# Altium PCB PCB_Smart_Door.PcbDoc
Units mil, origin at the board's own origin, x right, y up, seen from the top; angles counter-clockwise.
Board outline 4650 x 3255 mil, 2 copper layers (Top Layer, Bottom Layer); 55 components, 54 nets, 225 pads, 23 vias.
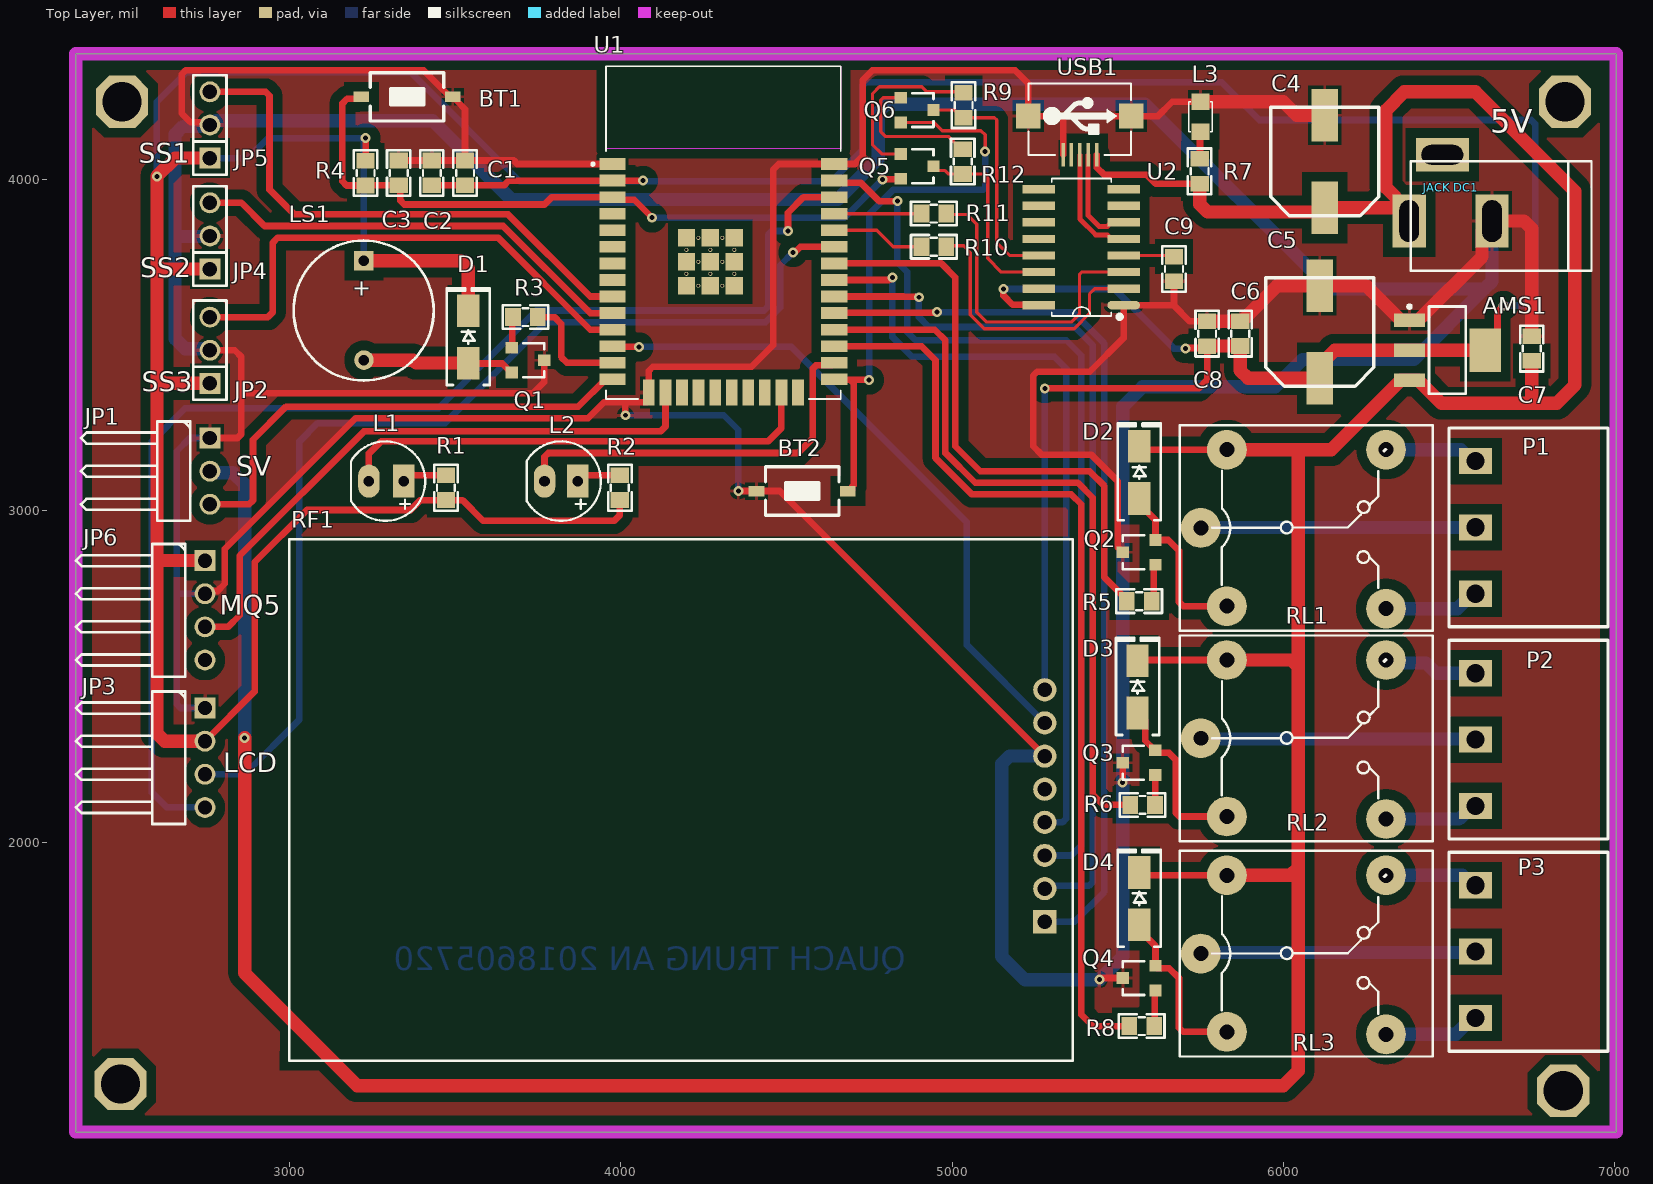
[diagram p0: Top Layer view]
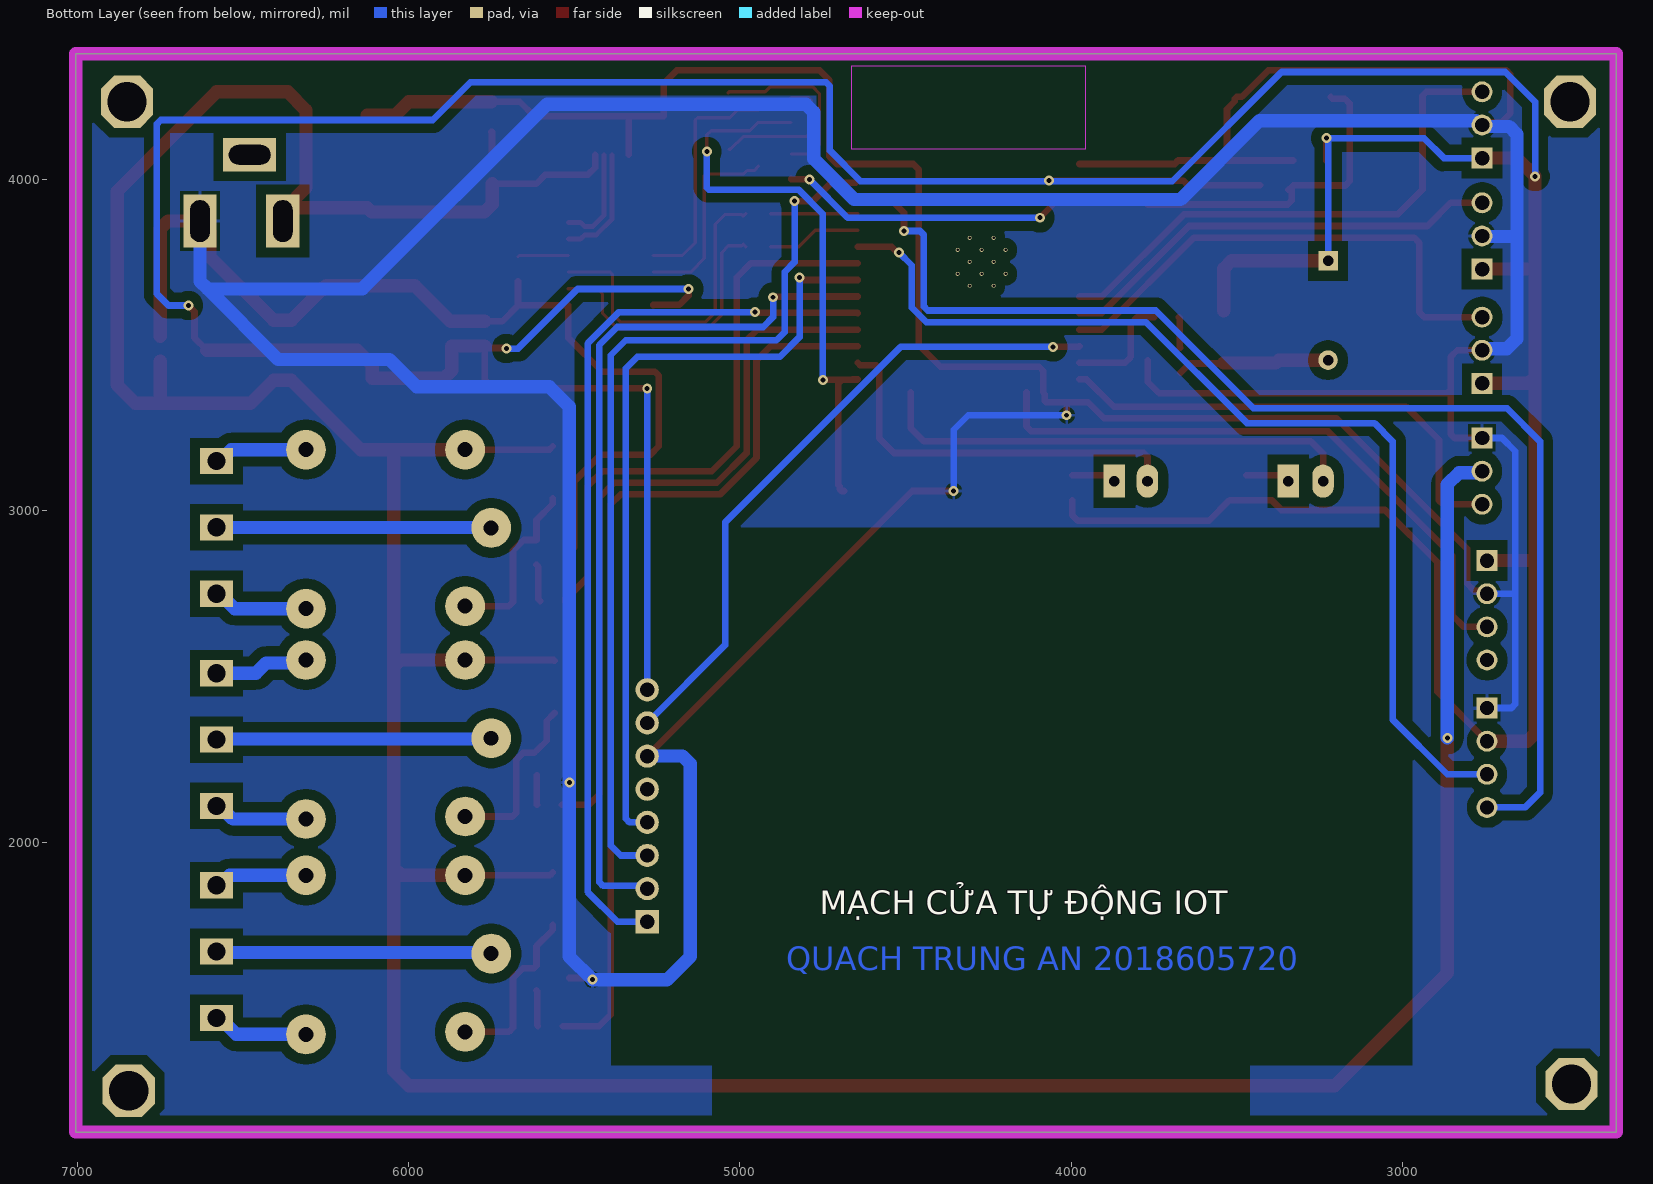
[diagram p1: Bottom Layer view, seen from below]

## Layer stack, top to bottom
Top Solder: solder mask 0.4, Solder Resist, Dk 3.5
Top Layer: signal copper 1.4
Dielectric 1: dielectric 12.6, FR-4, Dk 4.8
Bottom Layer: signal copper 1.4
Bottom Solder: solder mask 0.4, Solder Resist, Dk 3.5

## Board outline
2355,1125 2355,4380 7005,4380 7005,1125

## Design rules (kind name [scope] priority, off if disabled: settings)
Clearance pOLYGON [All vs InPolygon] p1: gap=30 ignorepadtopadclearanceinfootprint=FALSE
Clearance [All] p2: gap=8 ignorepadtopadclearanceinfootprint=FALSE
DiffPairsRouting [All] p1: maxlimit=10 minlimit=10 mostfreqgap=10 toplayer_minwidth=15 toplayer_maxwidth=15 toplayer_prefwidth=15 bottomlayer_minwidth=15 bottomlayer_maxwidth=15 bottomlayer_prefwidth=15 maxuncoupledlength=500
PolygonConnect [All] p1: connectstyle=Relief reliefconductorwidth=10 reliefentries=4 polygonreliefangle="90 Angle" airgapwidth=10
RoutingVias [All] p1: holewidth=28 width=50 viastyle="Through Hole" minholewidth=10 minwidth=20 maxholewidth=15 maxwidth=30
SolderMaskExpansion [All] p1: expansion=4 istentingtop=FALSE
Width [All] p1: maxlimit=40 minlimit=10 preferedwidth=20
29 further rules are at their usual default settings.

## Classes and differential pairs
differential pair USB: +USB_P -USB_N

## Components (designator, comment, footprint, x,y, rotation, side; value= is the part's Value field where it differs from the comment)
AMS1 "AMS1117-3.3V" SOT223 6495,3485 r270 top value="AMS1117-3.3V SOT223"
BT1 "Nut Nhan 2 Chan SMD 3x6x2.5" "Nut Nhan 2 Chan SMD 3x6x2.5" 3355,4250 r180 top
BT2 "Nut Nhan 2 Chan SMD 3x6x2.5" "Nut Nhan 2 Chan SMD 3x6x2.5" 4547.8,3060 r0 top
C1 "106" "tu 0805" 3530,4020 r90 top
C2 "106" "tu 0805" 3429.8,4020 r90 top
C3 "106" "tu 0805" 3329.6,4020 r90 top
C4 "470uF" "tu nhom 8 (f)" 6125,4054.76 r90 top
C5 "470uF" "tu nhom 8 (f)" 6110,3540 r90 top
C6 "106" "tu 0805" 5870,3535 r90 top
C7 "106" "tu 0805" 6750,3490 r90 top
C8 "106" "tu 0805" 5770,3535 r270 top
C9 "106" "tu 0805" 5670,3730 r90 top
D1 "M7" "DIODE SMA" 3540,3525 r90 top
D2 "M7" "DIODE SMA" 5565,3116.26 r90 top
D3 "M7" "DIODE SMA" 5560,2468.74 r90 top
D4 "M7" "DIODE SMA" 5565,1830 r90 top
"JACK DC1" "JACK DC 5.5" "JACK DC 5.5" 6505,3975 r180 top value="Jac DC"
JP1 "JP 1x3 2.54" "JP 1x3 DC" 2660,2970 r270 top
JP2 "JP 1x3 2.54" "JP 1x3 DT" 2760,3385 r90 top
JP3 "JP 1x4 2.54" "JP 1x4 DC" 2645,2055 r270 top
JP4 "JP 1x3 2.54" "JP 1x3 DT" 2760,3730 r90 top
JP5 "JP 1x3 2.54" "JP 1x3 DT" 2760,4065 r90 top
JP6 "JP 1x4 2.54" "JP 1x4 DC" 2645,2500 r270 top
L1 "LED 5mm" LED-5MM-Green 3340,3090 r180 top
L2 "LED 5mm" LED-5MM-RED 3870,3090 r180 top
L3 "LED 0805" LED-0805-Red 5750,4145 r90 top
LS1 "Coi Chip Speaker" "Coi Chip Speacker" 3224.5,3755 r270 top
P1 "CON 3 EDG5.08" "CON 3 3EDG5.08" 6580,3150.5 r270 top
P2 "CON 3 EDG5.08" "CON 3 3EDG5.08" 6580,2510 r270 top
P3 "CON 3 EDG5.08" "CON 3 3EDG5.08" 6580,1870 r270 top
Q1 "HF" SOT23 3720,3455 r270 top value=C9014
Q2 "HF" SOT23 5565,2875 r90 top value=C9014
Q3 "HF" SOT23 5564.21,2240 r90 top value=C9014
Q4 "HF" SOT23 5565,1590 r90 top value=C9014
Q5 "HF" SOT23 4895,4040 r270 top value=C9014
Q6 "HF" SOT23 4895,4210 r270 top value=C9014
R1 "220R" "tro smd 0805" 3470,3070 r90 top
R2 "220R" "tro smd 0805" 3995,3070 r90 top
R3 "200R" "tro smd 0805" 3712.57,3582.61 r180 top
R4 "10k" "tro smd 0805" 3232.39,4019.9 r270 top
R5 "200R" "tro smd 0805" 5565,2730 r0 top
R6 "200R" "tro smd 0805" 5575,2115 r0 top
R7 "2k" "Tro SMD 0805" 5745,4025 r90 top
R8 "200R" "tro smd 0805" 5572.43,1447.39 r0 top
R9 "10k" "tro smd 0805" 5037.39,4224.72 r270 top
R10 "470R" "Tro SMD 0805" 4945,3800 r0 top
R11 "470R" "Tro SMD 0805" 4945,3900 r0 top
R12 "10k" "tro smd 0805" 5035,4054.72 r270 top
RF1 "MOD RFID RC522" "MOD RFID RC522" 5280,1760 r90 top
RL1 "Relay" "Relay 5 Chan SRD" 5750.94,2948.78 r0 top
RL2 "Relay" "Relay 5 Chan SRD" 5750.94,2313.78 r0 top
RL3 "Relay" "Relay 5 Chan SRD" 5750.94,1663.78 r0 top
U1 "ESP32 WROOM 32" ESP32-WROOM-32D 4310,3840 r0 top
U2 "CH340C" SOIC16_50_284_25X90_SMT 5390,3795 r180 top
USB1 "USB Micro 5p SMD" "USB Micro 5p SMD" 5385.59,4075 r0 top

## Footprints (in the part's own frame and the unit in brackets; to place one, negate y for a bottom-side part, rotate by r counter-clockwise, add the part's x,y. Pads: shape width x height; smd on the part's side, far side on the other; paste and mask are expansions set on the pad)
"Coi Chip Speacker" [mm]
  rect 1.5x1.5 hole 0.8: 1(0,0)
  round 1.5 hole 0.8: 2(7.62,0.013)
  silkscreen extent -1.55,-5.38 9.18,5.36, body extent -2.22,-6 13.24,6, height 4.5
"CON 3 3EDG5.08" [mm]
  rect 2x2.5 hole 1.4: 1(0,0) 2(5.08,0) 3(10.173,0)
  silkscreen extent -2.54,-2.03 12.71,10.16, body extent -2.5,-1.75 12.67,10.25, height 3.15
"DIODE SMA" [mm] "SMA"
  rect 2.5x1.7 smd: 1(-2,0) 2(2,0)
  silkscreen extent -3.68,-1.65 3.75,1.65, body extent -2.6,-1.37 2.6,1.37, height 2.4
ESP32-WROOM-32D [mm]
  rect 2x0.9 smd: 1(-8.5,5.26) 2(-8.5,3.99) 3(-8.5,2.72) 4(-8.5,1.45) 5(-8.5,0.18) 6(-8.5,-1.09) 7(-8.5,-2.36) 8(-8.5,-3.63) 9(-8.5,-4.9) 10(-8.5,-6.17) 11(-8.5,-7.44) 12(-8.5,-8.71) 13(-8.5,-9.98) 14(-8.5,-11.25) 25(8.5,-11.25) 26(8.5,-9.98) 27(8.5,-8.71) 28(8.5,-7.44) 29(8.5,-6.17) 30(8.5,-4.9) 31(8.5,-3.63) 32(8.5,-2.36) 33(8.5,-1.09) 34(8.5,0.18) 35(8.5,1.45) 36(8.5,2.72) 37(8.5,3.99) 38(8.5,5.26)
  rect 0.9x2 smd: 15(-5.715,-12.25) 16(-4.445,-12.25) 17(-3.175,-12.25) 18(-1.905,-12.25) 19(-0.635,-12.25) 20(0.635,-12.25) 21(1.905,-12.25) 22(3.175,-12.25) 23(4.445,-12.25) 24(5.715,-12.25)
  rect 1.33x1.33 smd: 39(-2.835,-4.075) 39(-2.835,-2.24) 39(-2.835,-0.405) 39(-1,-4.075) 39(-1,-2.24) 39(-1,-0.405) 39(0.835,-4.075) 39(0.835,-2.24) 39(0.835,-0.405)
  round 0.3 hole 0.2: 39(-2.835,-3.157) 39(-2.835,-1.322) 39(-1.917,-4.075) 39(-1.917,-2.24) 39(-1.917,-0.405) 39(-1,-3.157) 39(-1,-1.322) 39(-0.082,-4.075) 39(-0.082,-2.24) 39(-0.082,-0.405) 39(0.835,-3.157) 39(0.835,-1.322)
  Keep-Out Layer region: 9,6.45 -9,6.45 -9,12.75 9,12.75
  Keep-Out Layer region: 9,6.45 -9,6.45 -9,12.75 9,12.75
  silkscreen extent -10.1,-12.75 9,12.75, body extent -9,-12.62 9,12.88, height 3.2
"JACK DC 5.5" [mil] "Jac DC input"
  rect 100x160 hole 59.06 slot 125.98 at 90 deg: 1(125,100) 2(-125,100)
  rect 160x100 hole 59.06 slot 125.98 at 0 deg: 3(25,-100)
  silkscreen extent -425,-80 120,250, body extent -410,-105 134,269, height 434
"JP 1x3 DC" [mm]
  rect 1.6x1.6 hole 1.1: 1(-6.35,2.54)
  round 1.6 hole 1.1: 2(-3.81,2.54) 3(-1.27,2.54)
  silkscreen extent -7.62,-7.34 0,1.04, body extent -7.62,-7.52 0,2.84, height 2.55
"JP 1x3 DT" [mm]
  rect 1.6x1.6 hole 1.1: 1(0,0)
  round 1.6 hole 1.1: 2(2.54,0) 3(5.08,0)
  silkscreen extent -1.27,-1.27 6.35,1.27, body extent -1.27,-1.27 6.35,1.27, height 8.54
"JP 1x4 DC" [mm] "4 pins, 1 row, right angled, gold plating"
  rect 1.6x1.6 hole 1.1: 1(-8.89,2.54)
  round 1.6 hole 1.1: 2(-6.35,2.54) 3(-3.81,2.54) 4(-1.27,2.54)
  silkscreen extent -10.16,-7.34 0,1.04, body extent -10.16,-7.57 0,2.79, height 2.54
LED-5MM-Green [mil] "LED 2 PIN, 5 ly , Only colour,pin to pin 100mil"
  rect 65x100 hole 32: 1(-5,0)
  oval 65x100 hole 32: 2(100,0)
  silkscreen extent -70,-120 154,120, body extent -69,-120 145,117, height 339
LED-5MM-RED [mil] "LED 2 PIN, 5 ly , Only colour,pin to pin 100mil"
  rect 65x100 hole 32: 1(0,0)
  oval 65x100 hole 32: 2(100,0)
  silkscreen extent -70,-120 154,120, body extent -65,-119 149,118, height 339
LED-0805-Red [mil]
  rect 50x55 smd: 1(0,0) 2(90,0)
  silkscreen extent 0,-35 90,35, body extent 5,-25 85,25, height 43
"MOD RFID RC522" [mil] "RFID"
  rect 70x70 hole 43.31: 1(0,0)
  round 70 hole 43.31: 2(100,0) 3(200,0) 4(300,0) 5(400,0) 6(500,0) 7(600,0) 8(700,0)
  silkscreen extent -420,-85 1155,2280, body extent -420,-90 1155,2272, height 388
"Nut Nhan 2 Chan SMD 3x6x2.5" [mm] "Switch SMD type"
  rect 1.2x0.8 smd: 1(-3.5,0) 2(3.5,0)
  silkscreen extent -2.82,-1.85 2.82,1.85, body extent -3.05,-1.85 3.05,1.85, height 2.5
"Relay 5 Chan SRD" [mil] "Relay SPDT, 5 pin, 10A,W 650mil, L 800mil, H 800mil"
  round 120 hole 45: 1(0,0) 2(559.06,236.22) 3(559.06,-243.78) 4(78.74,-236.22) 5(78.74,236.22)
  silkscreen extent -63,-311 700,310, body extent -55,-306 697,304, height 602
SOIC16_50_284_25X90_SMT [mm]
  oval 2.5x0.635 smd mask+0.076: 1(-3.25,4.42)
  rect 2.5x0.635 smd mask+0.076: 2(-3.25,3.15) 3(-3.25,1.88) 4(-3.25,0.61) 5(-3.25,-0.66) 6(-3.25,-1.93) 7(-3.25,-3.2) 8(-3.25,-4.47) 9(3.25,-4.47) 10(3.25,-3.2) 11(3.25,-1.93) 12(3.25,-0.66) 13(3.25,0.61) 14(3.25,1.88) 15(3.25,3.15) 16(3.25,4.42)
  silkscreen extent -3.07,-5.3 2.26,5.44, body extent -3.02,-4.97 2.98,4.93, height 1.4
SOT23 [mm] "SOT23"
  rect 0.9x0.95 smd: 1(-0.95,-1.25) 2(0,1.25)
  rect 0.9x0.95 smd mask+0: 3(0.95,-1.25)
  silkscreen extent -1.3,-0.38 1.3,1.25, body extent -1.52,-1.23 1.48,1.27, height 1.06
SOT223 [mm]
  rect 1x2.4 smd: 1(-2.3,-2.9) 2(0,-2.9) 3(2.3,-2.9)
  rect 3.3x2.4 smd: 4(0,2.9)
  silkscreen extent -3.47,-3.02 3.35,1.4, body extent -3.25,-3.56 3.25,3.4, height 1.68
"tro smd 0805" [mm]
  rect 1.2x1.4 smd: 1(-0.946,-0.061) 2(0.954,-0.061)
  silkscreen extent -1.75,-0.97 1.75,0.84, body extent -1.56,-0.76 1.44,0.64, height 0.53
"Tro SMD 0805" [mm]
  rect 1.2x1.4 smd: 1(-0.946,-0.061) 2(0.954,-0.061)
  silkscreen extent -1.75,-0.97 1.75,0.84, body extent -1.56,-0.76 1.44,0.64, height 0.53
"tu 0805" [mm] "Compoment SMD 80x50mil"
  rect 1.2x1.4 smd: 1(-0.946,-0.003) 2(0.954,-0.003)
  silkscreen extent -1.75,-0.89 1.75,0.89, body extent -1.01,-0.64 1.01,0.63, height 0.61
"tu nhom 8 (f)" [mm]
  rect 4x2 smd: 1(-3.55,0) 2(3.55,0)
  silkscreen extent -4.15,-4.15 4.15,4.15, body extent -4.85,-4.25 4.85,4.25, height 10.5
"USB Micro 5p SMD" [mil]
  rect 10x70 smd: 1(51.18,0) 2(25.59,0) 3(0,0) 4(-25.59,0) 5(-50,0)
  rect 74.8x74.8 smd: 5(-155.51,116.84) 5(155.51,116.84)
  silkscreen extent -155,-1 155,215, body extent -157,5 158,218, height 107

## Part data
AMS1: library part "AMS1117 SMD", "Dán", Chung_Loai=Dán, Don_Vi=Con, Ma_Hang=MH000596
C1 C2 C3 C6 C7 C8 C9: library part "Tu 0805 106 16V 10%", "Dán", Chung_Loai=Dán, Don_Vi=Con, Ma_Hang=MH004553, So_Chan=2, Ten_Linh_Kien="Tụ 0805 106-10uF 10% 16V"
C4 C5: library part "Tu Nhom 470uF 16V", "Dán", Chung_Loai=Dán, Don_Vi=Con, Ma_Hang=MH001940, So_Chan=2, Ten_Linh_Kien="Tụ Nhôm 470uF 16V 8x10.4MM"
D1 D2 D3 D4: library part "Diode M7 ( 4007 )", "Dán", Chung_Loai=Dán, Don_Vi=Con, Ma_Hang=MH000944, Ten_Linh_Kien="Diode M7 1N4007 SMD 1A 1000V"
JP1: library part "JP 1x3 2.54 Duc Cong", "Cắm", Chung_Loai=Cắm, Don_Vi=Con, Ma_Hang=MH000904, Ten_Linh_Kien="Jump Đơn Đực 2.54MM 1x40P Cong Đứng"
JP2 JP4 JP5: library part "JP 1x3 2.54 Duc Thang", "Cắm", Chung_Loai=Cắm, Don_Vi=Con, Ma_Hang=MH000903, Ten_Linh_Kien="Jump Đơn Đực 2.54MM 1x40P Thẳng 11MM"
JP3 JP6: library part "JP 1x4 2.54 Duc Cong", "Cắm", Chung_Loai=Cắm, Don_Vi=Con, Ma_Hang=MH000904, Ten_Linh_Kien="Jump Đơn Đực 2.54MM 1x40P Cong Đứng"
L1: library part "LED 5mm Xanh La", "Cắm", Chung_Loai=Cắm, Don_Vi=Con, Ma_Hang=MH008969, Ten_Linh_Kien="LED 5MM Phủ Xanh (1000c)"
L2: library part "LED 5mm Do", "Cắm", Chung_Loai=Cắm, Don_Vi=Con, Ma_Hang=MH008967, Ten_Linh_Kien="Led 5MM Phủ Đỏ (1000c)"
L3: library part "LED 0805 Do", "Dán", Chung_Loai=Dán, Don_Vi=Con, Ma_Hang=MH000897, Ten_Linh_Kien="LED 0805 Màu Đỏ (Red)"
LS1: "Còi chip"
P1 P2 P3: "Cắm", Chung_Loai=Cắm, Don_Vi=Con, Ma_Hang=MH000760, Ten_Linh_Kien="CON 3 2EDG5.08-3P 5.08MM ( Xanh Cong)"
Q1 Q2 Q3 Q4 Q5 Q6: library part "C1815 HF SMD", "NPN transistor"
R1 R2: library part "Tro 0805 5% 220R", "Dán", Chung_Loai=Dán, Don_Vi=Con, Ma_Hang=MH005259, So_Chan=2, Ten_Linh_Kien="Trở 0805 5% 220R"
R3 R5 R6 R8: library part "Tro 0805 5% 200R", "Dán", Chung_Loai=Dán, Don_Vi=Con, Ma_Hang=MH005257, So_Chan=2, Ten_Linh_Kien="Trở 0805 5% 200R"
R4 R9 R12: library part "Tro 0805 5% 10k", "Dán", Chung_Loai=Dán, Don_Vi=Con, Ma_Hang=MH005239, So_Chan=2, Ten_Linh_Kien="Trở 0805 5% 10k"
R7: library part "Tro 0805 5% 2k", "Dán", Chung_Loai=Dán, Don_Vi=Con, Ma_Hang=MH005304, So_Chan=2, Ten_Linh_Kien="Trở 0805 5% 2k"
R10 R11: library part "Tro 0805 5% 470R", "Dán", Chung_Loai=Dán, Don_Vi=Con, Ma_Hang=MH005341, So_Chan=2, Ten_Linh_Kien="Trở 0805 5% 470R"
RL1 RL2 RL3: library part "Relay 5 Chan SRD", "Relay 5 Chan", Ma_Hang=MH009374, Ten="Relay 5V10A SRD-05VDC-SL-C Chính Hãng"
U2: "USB Bridge, USB to UART USB 2.0 UART Interface", Alternate Part Number-1=NA, Case/Package=SOIC16, Manufacturer=Olimex, Supplier Part Number-1=C84681, Manufacturer Part Number=CH340C, Supplier-1=LCSC
USB1: "USB Type B", Ma_Hang=MH001020, Ten="MicroUSB MK5P SMD"
BT1 BT2: Ma_Hang=MH001036, Ten="Nút Nhấn 2 Chân 3x6x2.5MM SMD"

## Free pads (board coordinates)
  oct 157.48x157.48 hole 118.11: 15(6850,4235) 16(6845,1250) 17(2490,1270) 18(2495,4235)

## Via types
v1: diameter 30, hole 15, Top Layer to Bottom Layer, 23 vias

## Nets (pads, with @x,y where several pads share a name; then routed paths per layer and width w, separated by ;. In a path a pad name is that pad's centre, name@x,y a point inside that pad or via, vN(x,y) a via of type N, cw(c..) or ccw(c..) an arc to the next point about the centre after c; other vN are vias at no path point)
3.3V: AMS1.2 AMS1.4 C1.1 C2.1 C5.1 C6.1 C8.2 D1.2 JP2.1 JP3.2 JP4.1 JP5.1 JP6.1 LS1.1 R1.1 R2.1 R4.1 RF1.8 U1.2 U2.16 | length 15349
  Top Layer w20: JP3.2 2895,2455 2895,2845 3052.89,3002.89 3365.84,3002.89 3395.73,3032.77 R1.1 3522.23,3032.77 3585,2970 3980,2970 3997.39,2987.39 R2.1 ; R4.1 v1(3230,4125) ; C2.1 C1.1 3647.77,3982.77 3662.09,3997.09 U1.2 v1(4067.91,3997.09) ; v1(5155,3670) 5155,3650 5182.83,3622.17 5260.86,3622.17 U2.16 ; v1(5280,3370) 5745,3370 5770.04,3395.04 5770.04,3497.6 C8.2 5764.35,3491.91 5706.91,3491.91 v1(5705,3490) ; AMS1.4 6646.42,3522.24 6646.42,3601.42 v1(6665,3620)
  Top Layer w40: JP3.2 2623.43,2305 2600,2328.43 2600,2840 ; JP6.1 2610,2850 2600,2840 ; JP2.1 2620,3385 2600,3405 ; JP4.1 2610,3730 2600,3720 ; JP5.1 2655,4065 v1(2600,4010) 2600,3720 ; LS1.1 3516.57,3755 3540,3731.57 D1.2 ; C8.2@5770.04,3497.6 5869.96,3497.6 C6.1 5870.13,3423.67 5893.57,3400.24 C5.1 6110,3439.61 6155.39,3485 AMS1.2 AMS1.4 ; 2600,2840 2600,3405 ; 2600,3405 2600,3720
  Bottom Layer w20: v1(2600,4010) 2600,4235 2690,4325 3365,4325 3695,3995 4636.26,3995 4728.76,4087.5 4728.76,4282.04 4740.48,4293.76 5813.76,4293.76 5927.52,4180 6748.28,4180 6760,4168.28 6760,3655 6725,3620 v1(6665,3620) ; JP5.1 2875,4065 2935,4125 v1(3230,4125) 3230,4122.29 3224.5,4116.79 LS1.1 ; v1(5155,3670) 5490,3670 5670,3490 v1(5705,3490) ; RF1.8 v1(5280,3370)
5V: "JACK DC1.1" AMS1.3 C4.1 C7.1 D2.2 D3.2 D4.2 JP1.2 R7.1 RL1.5 RL2.5 RL3.5 USB1.1 | length 12126.6
  Top Layer w20: USB1.1 5436.77,4036.77 5458.54,4015 5587.39,4015 5614.61,3987.77 R7.1 ; D3.2 5562.52,2550 RL2.5 ; D4.2 5573.74,1900 RL3.5 ; D2.2 5575,3185 RL1.5
  Top Layer w40: v1(2865,2315) 2865,1605 3205,1265 6000,1265 6045,1310 6045,1923.43 ; R7.1 5747.39,3926.04 5770.83,3902.61 6112.61,3902.61 C4.1 6350,3915 6370,3895 ; RL3.5 6021.57,1900 6045,1923.43 ; RL2.5 6025,2550 6045,2530 ; RL1.5 6045,3185 ; 6380,3875 6370,3885 6370,3895 ; C7.1 6750.13,3325.13 6750,3325 ; 6045,1923.43 6045,2530 ; 6045,2530 6045,2550 6045,3185 ; 6045,3185 6144.45,3185 6353.9,3394.45 AMS1.3 6407.76,3394.45 6477.2,3325 6750,3325 ; 6370,3895 6370,3915 6310,3975 6310,4210 6365,4265 6580,4265 6880,3965 6880,3380 6825,3325 6750,3325
  Bottom Layer w40: JP1.2 2764.4,3115.6 2829.4,3115.6 2865,3080 v1(2865,2315)
DTR: Q6.2 R9.2 U2.13 | length 716.4
  Top Layer w10: Q6.2 5008.21,4210 5031.06,4187.15 R9.2 5127.85,4187.15 5135,4180 5135,3810 5174.02,3770.98 U2.13
EN: BT1.2 C3.1 Q5.3 R4.2 U1.3 | length 2131.4
  Top Layer w20: BT1.2 3211.46,4244.25 3174.25,4244.25 3160,4230 3160,3995 3172.68,3982.32 R4.2 3230.22,3982.55 3329.51,3982.55 C3.1 3340,3972.5 3338.35,3972.5 C3.1@3335,3969.15 ; C3.1@3345,3969.15 C3.1@3335,3969.15 ; v1(4095,3885) 4040.63,3939.37 3983.07,3939.37 U1.3 3792.09,3947.09 3770,3925 3346.72,3925 3335,3936.72 C3.1@3335,3969.15 ; v1@4796.3,4001.3 4844.49,4001.3 Q5.3
  Bottom Layer w20: v1(4095,3885) 4675,3885 v1(4790,4000)
GND: "JACK DC1.2" AMS1.1 BT1.1 BT2.1 C1.2 C2.2 C3.2 C4.2 C5.2 C6.2 C7.2 C8.1 C9.1 JP1.1 JP2.2 JP3.1 JP4.2 JP5.2 JP6.2 L3.2 Q1.2 Q2.2 Q3.2 Q4.2 RF1.6 U1.1 U1.15 U1.38 U2.1 USB1.5 | length 23928
  Top Layer w20: JP6.2 2753.23,2758.23 2783.23,2758.23 2805,2780 2805,2885 3200,3280 3901.97,3280 3950.31,3328.35 4013.8,3328.35 ; JP1.1 2843.28,3220 2855,3231.72 2855,3365 ; JP2.2 2835,3485 2855,3465 2855,3365 ; JP5.2 2751.77,4173.23 2701.77,4173.23 2675,4200 2675,4318.28 2686.72,4330 3404.92,4330 3484.92,4250 BT1.1 3500.67,4250 3506.42,4244.25 3506.42,4236.38 3530.13,4212.66 C1.2 ; C3.2 C2.2 C1.2 ; Q1.2 3769.21,3389.21 3735,3355 2865,3355 2855,3365 ; U1.1 3687.91,4047.09 3677.43,4057.57 C1.2 ; v1(4013.8,3288.8) 4013.8,3328.35 ; v1(4355,3060) BT2.1 4480,3060 RF1.6 ; USB1.5@5335.59,4075 5335.59,4186.25 5330,4191.84 ; v1(5445,1585) 5450,1590 Q4.2 ; v1(5515,2180) Q3.2 ; Q2.2 5514.8,2875 5507.09,2882.72 5507.09,2883.7 5500,2890.79 5500,3090 5420,3170 5270,3170 5245,3195 5245,3408.28 5256.72,3420 5415.91,3420 5517.95,3522.05 U2.1 5669.02,3620.98 5670.13,3619.87 ; C9.1 5670.13,3619.87 ; L3.2 5665,4235 5621.84,4191.84 5541.1,4191.84 5330,4191.84 ; C8.1 5717.77,3572.23 5670.13,3619.87 ; 4013.8,3328.35 4077.28,3328.35 4080,3331.06 4080,3352.72 U1.15 4085,3423.28 4096.72,3435 4395,3435 4460,3500 4460,4030 4477.09,4047.09 U1.38 4707.09,4047.09 4730,4070 4730,4300 4760,4330 5190,4330 5230.08,4289.92 5230.08,4191.84 5330,4191.84
  Top Layer w40: L3.2 6000,4235 6040.47,4194.53 C4.2 ; C8.1 5770.04,3572.4 5869.96,3572.4 C6.2 5874.07,3572.57 5981.26,3679.76 C5.2 6249.69,3679.76 6353.9,3575.55 AMS1.1 6407.76,3575.55 6600,3767.8 6600,3845 6630,3875 6726.7,3875 6750.13,3851.57 C7.2
  Bottom Layer w20: JP3.1 2671.72,2405 2660,2416.72 2660,2750 ; JP6.2 2660,2750 ; JP1.1 2700,3220 2660,3180 2660,2750 ; v1(4013.8,3288.8) 4311.2,3288.8 4355,3245 v1(4355,3060)
  Bottom Layer w40: JP2.2 2755.6,3489.4 2685.6,3489.4 2655,3520 2655,3828.58 ; JP4.2 2758.58,3828.58 2655,3828.58 ; RF1.6 5173.43,2260 5150,2236.57 5150,1655 5220,1585 v1(5445,1585) 5515,1655 v1(5515,2180) 5515,3315 5575,3375 5975.78,3375 6057.78,3457 6393.57,3457 6606.57,3670 ; 6630,3875 6630,3693.43 6606.57,3670 ; 2655,3828.58 2655,4137.17 2678.43,4160.6 2755.6,4160.6 JP5.2 2766.22,4165 2779.22,4178 3432,4178 3670,3940 4655,3940 4777.5,4062.5 4777.5,4204.07 4800.93,4227.5 5582.5,4227.5 6140,3670 6606.57,3670
IO0: BT2.2 Q6.3 U1.25 | length 1819.9
  Top Layer w10: U1.25@4660,3397.09 4661.04,3396.04 4662.09,3395 4693.28,3395 ; Q6.3 4945.4,4172.6 4970,4148 5087,4148 5100,4135 v1(5100,4085)
  Top Layer w20: U1.25@4660,3397.09 U1.25 4645.69,3396.04 4661.04,3396.04 4748.96,3396.04 v1(4750,3395) ; BT2.2 4693.46,3060 4699.21,3065.75 4699.21,3073.62 4702.91,3077.32 4702.91,3385.37 4693.28,3395
  Bottom Layer w20: v1(4750,3395) 4750,3896.67 4823.33,3970 5094.14,3970 5100,3975.86 v1(5100,4085)
LCD_SCL: JP3.4 U1.36 | length 3762.7
  Top Layer w20: v1(4505,3845) 4505,3900 4552.09,3947.09 U1.36
  Bottom Layer w20: JP3.4 2630,2105 2585,2150 2585,3210 2685,3310 3450,3310 3745,3605 4433.28,3605 4445,3616.72 4445,3833.28 4456.72,3845 v1(4505,3845)
LCD_SDA: JP3.3 U1.33 | length 3126.1
  Top Layer w20: v1(4520,3780) 4525,3780 4542.09,3797.09 U1.33
  Bottom Layer w20: JP3.3 2865,2205 3030,2370 3030,3210 3085,3265 3470,3265 3775,3570 4437.88,3570 4481.48,3613.6 4481.48,3741.48 v1(4520,3780)
LED_DO: L2.2 U1.26 | length 1188.5
  Top Layer w20: L2.2 3770,3163.28 3781.72,3175 4535,3175 4580,3220 4580,3430 4589.37,3439.37 4636.93,3439.37 U1.26
LED_XL: L1.2 U1.23 | length 1467.8
  Top Layer w20: L1.2 3240,3173.28 3276.72,3210 4445,3210 4485,3250 U1.23
LIGHT1: R5.1 U1.32 | length 1768
  Top Layer w20: U1.32 4967.91,3747.09 5010,3705 5010,3195 5085,3120 5415,3120 5460,3075 5460,2799.32 5527.77,2731.54 R5.1
LIGHT2: R6.1 U1.28 | length 2210.8
  Top Layer w20: U1.28 4947.91,3547.09 4980,3515 4980,3175 5070,3085 5380,3085 5425,3040 5425,2145 5457.39,2112.61 R6.1
LIGHT3: R8.1 U1.27 | length 2815.5
  Top Layer w20: U1.27 4907.91,3497.09 4950,3455 4950,3160 5060,3050 5360,3050 5390,3020 5390,1480 5425,1445 R8.1
MQ5_D: JP6.3 U1.16 | length 1848.8
  Top Layer w20: JP6.3 2815,2650 2850,2685 2850,2865 3225,3240 4120,3240 4135,3255 U1.16
NetC9_2: C9.2 U2.4 | length 153.6
  Top Layer w10: U2.4 5666.73,3770.98 C9.2
NetD1_1: D1.1 LS1.2 Q1.3 | length 461.3
  Top Layer w20: D1.1 3541.26,3445 3642.4,3445 3669.8,3417.6 Q1.3
  Top Layer w40: LS1.2 3373.98,3455 3382.72,3446.26 D1.1
NetD2_1: D2.1 Q2.3 RL1.4 | length 534.5
  Top Layer w20: D2.1 5565,3021.77 5614.21,2972.56 Q2.3 5652.6,2912.4 5685,2880 5685,2725 5697.44,2712.56 RL1.4
NetD3_1: D3.1 Q3.3 RL2.4 | length 528.5
  Top Layer w20: D3.1 5583.46,2366.54 5583.46,2306.38 5612.44,2277.4 Q3.3 5621.14,2269.68 5655.31,2269.68 5675,2250 5675,2089.27 5686.72,2077.56 RL2.4
NetD4_1: D4.1 Q4.3 RL3.4 | length 530.4
  Top Layer w20: D4.1 5565,1735.51 5614.21,1686.3 Q4.3 5621.93,1619.68 5655.31,1619.68 5685,1590 5685,1440 5697.44,1427.56 RL3.4
NetL1_1: L1.1 R1.2 | length 146.6
  Top Layer w20: L1.1 3345,3092.5 3367.5,3115 3367.5,3107.57 R1.2
NetL2_1: L2.1 R2.2 | length 134.7
  Top Layer w20: L2.1 3887.57,3107.57 R2.2
NetL3_1: L3.1 R7.2 | length 83.5
  Top Layer w20: R7.2 5748.7,4063.88 5748.7,4143.7 L3.1
NetP1_1: P1.1 RL1.2 | length 284.3
  Bottom Layer w40: RL1.2 6535.66,3185 6570.16,3150.5 P1.1
NetP1_2: P1.2 RL1.1 | length 829.8
  Bottom Layer w40: RL1.1 5751.81,2949.64 6579.14,2949.64 P1.2
NetP1_3: P1.3 RL1.3 | length 288.6
  Bottom Layer w40: RL1.3 6525.16,2705 6570.16,2750 P1.3
NetP2_1: P2.1 RL2.2 | length 286.6
  Bottom Layer w40: RL2.2 6318.78,2541.22 6430,2541.22 6461.22,2510 P2.1
NetP2_2: P2.2 RL2.1 | length 830.6
  Bottom Layer w40: RL2.1 5752.83,2311.89 6578.11,2311.89 P2.2
NetP2_3: P2.3 RL2.3 | length 286.4
  Bottom Layer w40: RL2.3 6530.66,2070 6570.16,2109.5 P2.3
NetP3_1: P3.1 RL3.2 | length 282.4
  Bottom Layer w40: RL3.2 6540.16,1900 6570.16,1870 P3.1
NetP3_2: P3.2 RL3.1 | length 831.6
  Bottom Layer w40: RL3.1 5754.06,1666.89 6576.89,1666.89 P3.2
NetP3_3: P3.3 RL3.3 | length 290.5
  Bottom Layer w40: RL3.3 6520.66,1420 6570.16,1469.5 P3.3
NetQ1_1: Q1.1 R3.2 | length 94.3
  Top Layer w20: Q1.1 3672.89,3494.51 3672.89,3582.89 R3.2
NetQ2_1: Q2.1 R5.2 | length 114.8
  Top Layer w20: R5.2 5608.39,2733.43 5608.39,2831.78 Q2.1
NetQ3_1: Q3.1 R6.2 | length 90.3
  Top Layer w20: R6.2 5613,2113.03 5613,2202.17 Q3.1
NetQ4_1: Q4.1 R8.2 | length 109.3
  Top Layer w20: R8.2 5612.11,1447.11 5612.11,1550.49 Q4.1
NetQ5_1: Q5.1 R9.1 | length 542.6
  Top Layer w10: Q5.1 4787.6,4077.4 4760,4105 4760,4259.14 4780.98,4280.12 4909.1,4280.12 4924.22,4265 5031.95,4265 R9.1
NetQ6_1: Q6.1 R12.1 | length 428.4
  Top Layer w10: Q6.1 4792.4,4247.4 4785,4240 4785,4145 4800,4130 4990.62,4130 5028.67,4091.95 R12.1
NetR10_2: R10.2 U2.2 | length 838.6
  Top Layer w10: R10.2 4989.97,3805 4994.97,3800 5035,3800 5055,3780 5055,3591.72 5096.72,3550 5368.28,3550 5415,3596.72 5415,3655 5430.98,3670.98 U2.2
NetR11_2: R11.2 U2.3 | length 963.4
  Top Layer w10: R11.2 4990.18,3890 4995.18,3895 5045,3895 5075,3865 5075,3600 5105,3570 5360,3570 5385,3595 5385,3715.12 5390.86,3720.98 U2.3
RFID_CLK: RF1.2 U1.30 | length 2649.9
  Top Layer w20: U1.30 4852.91,3647.09 4853.09,3646.91 4898.09,3646.91 v1(4900,3645)
  Bottom Layer w20: v1(4900,3645) 4900,3585 4930,3555 5370.4,3555 5425,3500.4 5425,1880 5413.28,1868.28 5288.28,1868.28 RF1.2
RFID_MISO: RF1.4 U1.31 | length 2351.1
  Top Layer w20: U1.31 4809.38,3697.09 4817.29,3705 v1(4820,3705)
  Bottom Layer w20: v1(4820,3705) 4820,3525 4880,3465 5310,3465 5345,3430 5345,2071.72 5333.28,2060 RF1.4
RFID_MOSI: RF1.3 U1.37 | length 2779.9
  Top Layer w20: U1.37 4650.75,3990.98 4724.02,3990.98 4780,3935 v1(4835,3935)
  Bottom Layer w20: v1(4835,3935) 4835,3751.15 4865,3721.15 4865,3540 4890,3515 5345,3515 5390,3470 5390,1990 5360,1960 RF1.3
RFID_RST: RF1.7 U1.12 | length 1992.4
  Top Layer w20: U1.12 3976.4,3496.04 4053.96,3496.04 v1(4055,3495)
  Bottom Layer w20: v1(4055,3495) 4515,3495 5045,2965 5045,2595 RF1.7
RFID_SS: RF1.1 U1.29 | length 2728.2
  Top Layer w20: U1.29 4646.1,3598.54 4953.54,3598.54 v1(4955,3600)
  Bottom Layer w20: v1(4955,3600) 5365,3600 5460,3505 5460,1850 5370,1760 RF1.1
RTS: Q5.2 R12.2 U2.14 | length 595.9
  Top Layer w10: Q5.2 4956.93,4027.28 4978.91,4027.28 4989.05,4017.15 R12.2 5101.99,4017.15 5107.85,4011.29 5107.85,3762.15 5149.02,3720.98 U2.14
RXD0: R10.1 U1.34 | length 283.6
  Top Layer w10: U1.34 4772.91,3847.09 4822.39,3797.61 R10.1
SERVO: JP1.3 U1.14 | length 1478.9
  Top Layer w20: JP1.3 2878.28,3020 2890,3031.72 2890,3215 2990,3315 3871.61,3315 3953.7,3397.09 U1.14
SPEAKER: R3.1 U1.13 | length 341.3
  Top Layer w20: R3.1 3800,3585 3820,3565 3820,3465 3837.91,3447.09 U1.13
SS1: JP2.3 U1.11 | length 1552.9
  Top Layer w20: JP2.3 2935,3585 2950,3600 2950,3810 2965,3825 3630,3825 3907.91,3547.09 U1.11
SS2: JP4.3 U1.10 | length 1353.3
  Top Layer w20: JP4.3 2855,3930 2925,3860 3645,3860 3907.91,3597.09 U1.10
SS3: JP5.3 U1.9 | length 1637.2
  Top Layer w20: JP5.3 2928.28,4265 2940,4253.28 2940,3970 3015,3895 3660,3895 3907.91,3647.09 U1.9
TXD0: R11.1 U1.35 | length 263.3
  Top Layer w10: U1.35 4907.25,3897.09 R11.1
USB_N: U2.6 USB1.2 | length 309.5
  Top Layer w15: USB1.2 5410.89,4074.7 5410.89,3891.58 5443.99,3858.48 5468.74,3858.48 5481.24,3870.98 U2.6
USB_P: U2.5 USB1.3 | length 350.9
  Top Layer w15: USB1.3 5385.89,4074.7 5385.89,3881.23 5433.64,3833.48 5468.74,3833.48 5481.24,3820.98 U2.5
pads on no net: "JACK DC1.3" JP6.4 RF1.5 U1.4 U1.5 U1.6 U1.7 U1.8 U1.17 U1.18 U1.19 U1.20 U1.21 U1.22 U1.24 U1.39 U2.7 U2.8 U2.9 U2.10 U2.11 U2.12 U2.15 USB1.4

## Polygon pours and split planes (outlines as drawn)
GND on Bottom Layer "gnd top" (solid, remove dead copper, pour order 0): 2355,4375 6990,4375 6990,1130 2350,1130 2350,1135
GND on Top Layer "gnd top" (solid, remove dead copper, pour order 1): 2360,4375 7000,4375 7000,1120 2355,1120

## Keep-outs
Keep-Out Layer:
  the board outline again, w40

## Other copper
Top Layer:
  pour cut-out: 2973.94,2923.94 5380,2923.94 5380,1310 2970,1310
Bottom Layer:
  pour cut-out: 2970,2950 5390,2950 5390,1325 2970,1325
  text "QUACH TRUNG AN 2018605720" at 4860,1589.67 h120

## Silkscreen, mask and mechanical layers (free items; w line width, h text height)
Top Overlay:
  text "5V" at 6625,4116.64 h120
  text "SS1" at 2545,4031.37 h100
  text "SS2" at 2550,3686.37 h100
  text "SS3" at 2555,3341.37 h100
  text "SV" at 2840,3086.37 h100
  text "MQ5" at 2790.1,2666.4 h100
  text "LCD" at 2800,2191.37 h100
Bottom Overlay:
  text "MẠCH CỬA TỰ ĐỘNG IOT" at 4759.88,1757.95 h120

## Text inside footprints (layer, text, board x,y; h text height)
LS1: Top Overlay "+" at 3196.5,3699.5 h50 r270
U1: Mechanical 13 "ANTENNA" at 4073.78,4194.33 h50